# Altium PCB MAX77857.PcbDoc
Units mil, origin at the board's own origin, x right, y up, seen from the top; angles counter-clockwise.
Board outline 3537 x 1962 mil, 2 copper layers (Top Layer, Bottom Layer), stack 21 mil thick; 50 components, 58 nets, 221 pads, 51 vias.
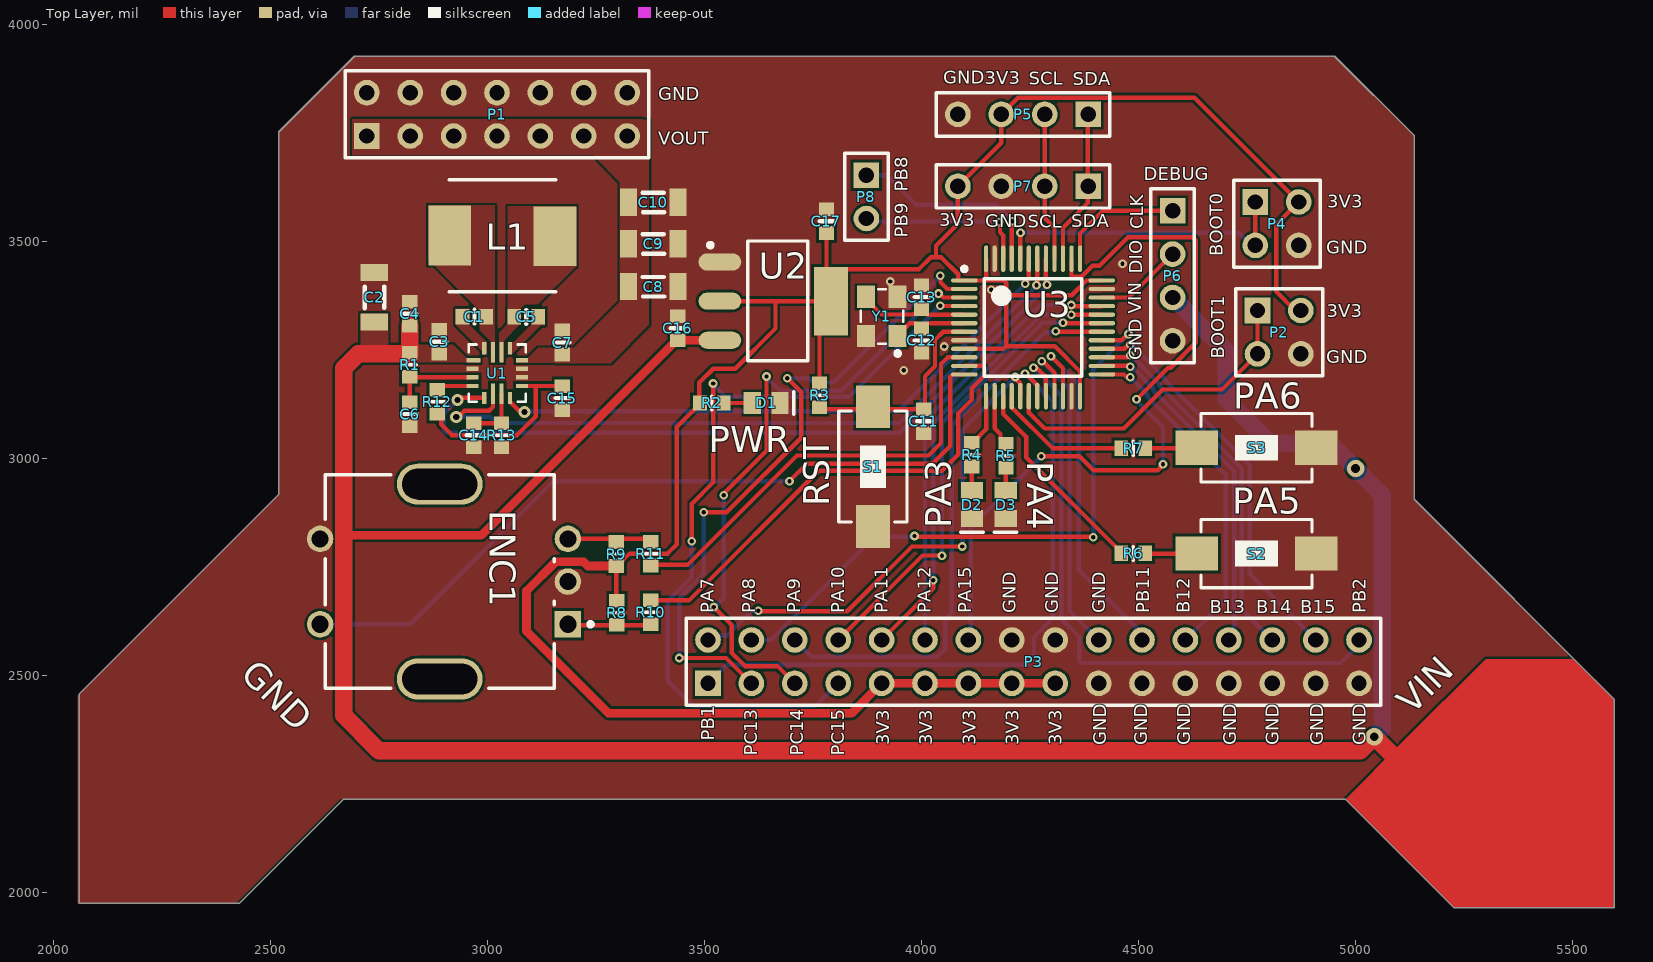
[diagram p0: Top Layer view]
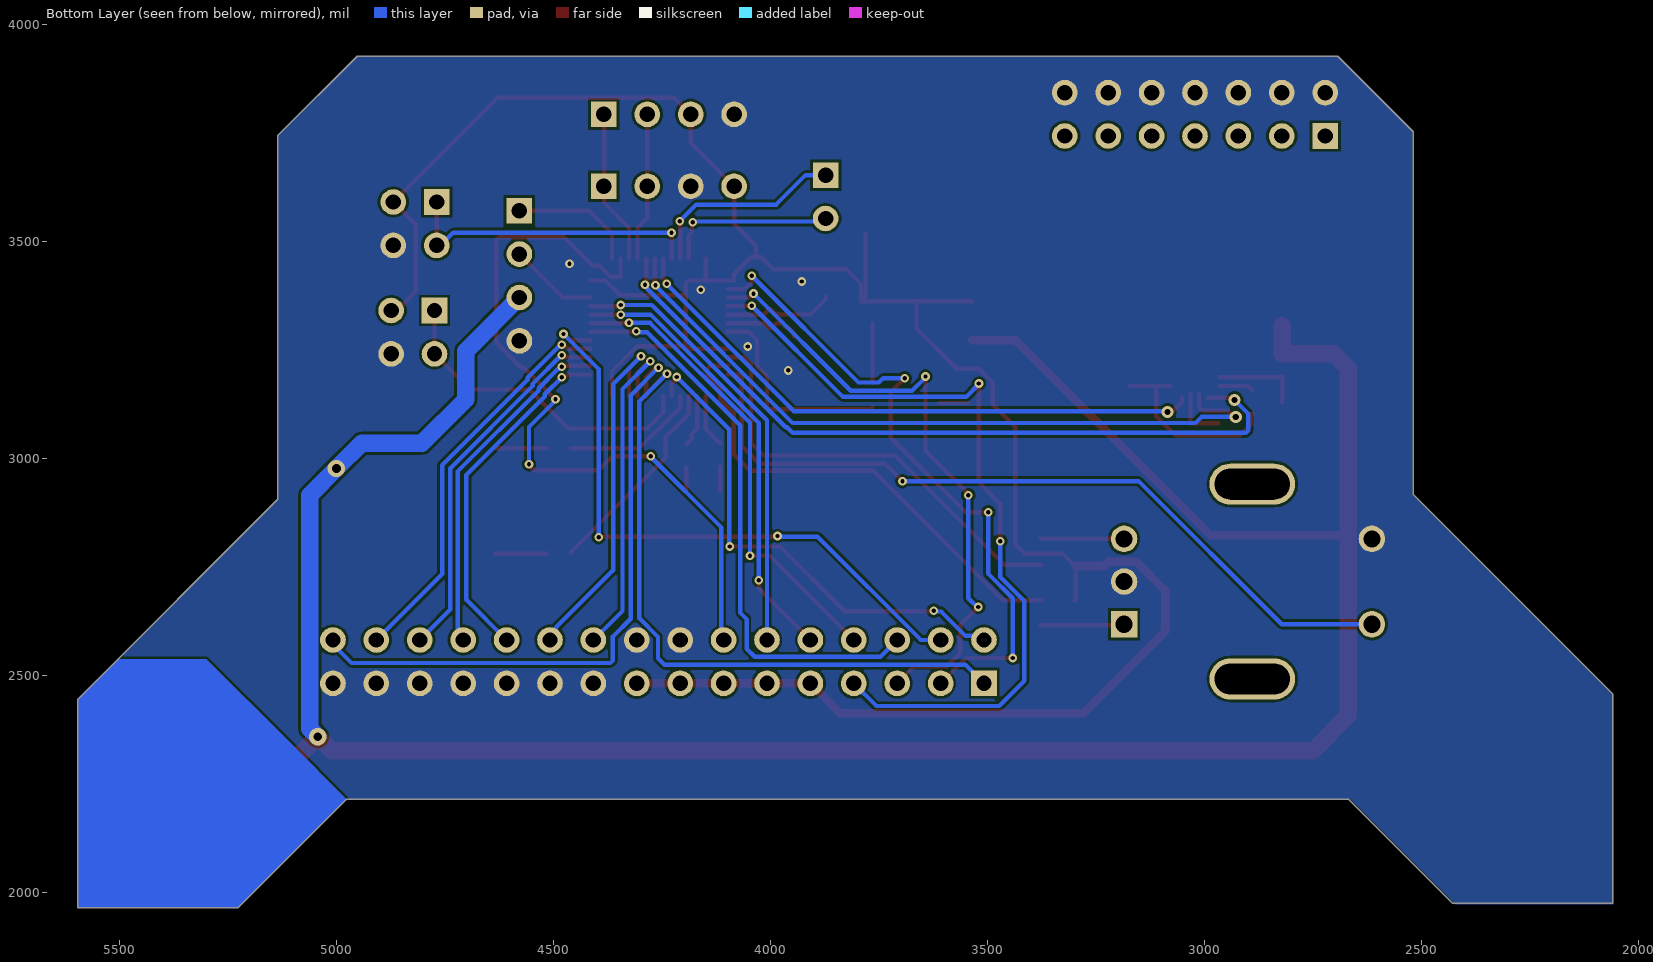
[diagram p1: Bottom Layer view, seen from below]
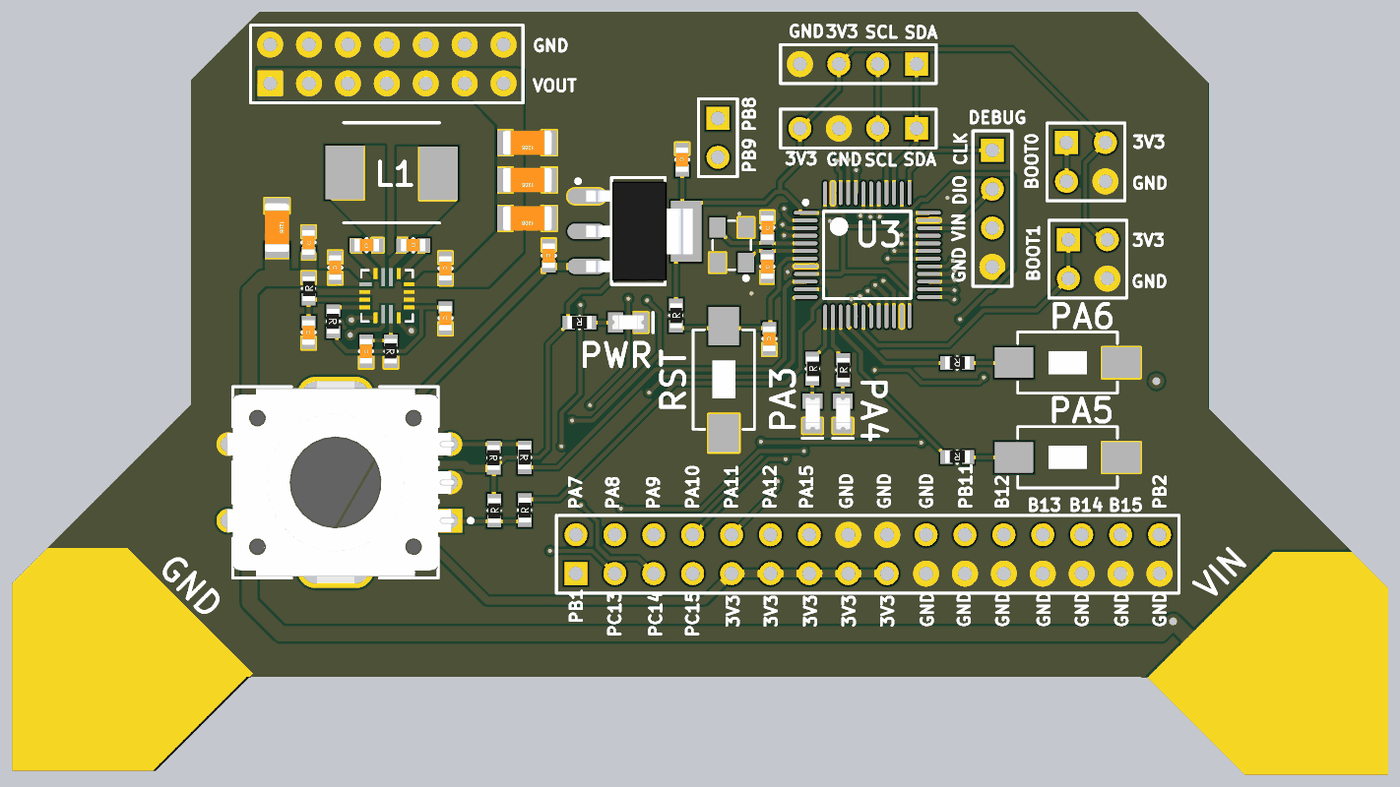
[diagram p2: 3D render of the assembled board from above, using the file's embedded part models]

## Layer stack, top to bottom
Top Solder: solder mask 0.4, Solder Resist, Dk 3.5
Top Layer: signal copper 1.4
Dielectric 2: prepreg 2.8, PP-006, Dk 4.1
Dielectric 1: dielectric 12.6, FR-4, Dk 4.8
Dielectric 3: prepreg 2.8, PP-006, Dk 4.1
Bottom Layer: signal copper 1.4
Bottom Solder: solder mask 0.4, Solder Resist, Dk 3.5

## Board outline
2059,1975 2060,1974 2428,1974 2668,2214 4977,2214 5227,1964 5596,1964 5596,2444 5135,2905 5135,3743 4952,3926 2693,3926 2519,3752 2519,2916 2059,2456

## Design rules (kind name [scope] priority, off if disabled: settings)
Clearance [All] p1: gap=6 ignorepadtopadclearanceinfootprint=TRUE
PolygonConnect [All] p1: connectstyle=Direct reliefconductorwidth=10 reliefentries=4 polygonreliefangle="90 Angle" airgapwidth=10
RoutingVias [All] p1: holewidth=28 width=50 viastyle="Through Hole" minholewidth=28 minwidth=50 maxholewidth=28 maxwidth=50
SolderMaskExpansion [All] p1: expansion=4 istentingtop=FALSE
Width [All] p1: maxlimit=100 minlimit=10 preferedwidth=10
30 further rules are at their usual default settings.

## Components (designator, comment, footprint, x,y, rotation, side; value= is the part's Value field where it differs from the comment)
C1 "Cap-S" C0603-L 2969.94,3325.77 r0 top value=100nF
C2 "Cap-S" C1206-L 2739.5,3370.23 r270 top value=100uF
C3 "Cap-S" C0603-L 2889.26,3267.98 r270 top value=22uF
C4 "Cap-S" C0603-L 2820.72,3332.77 r90 top value=0.1uF
C5 "Cap-S" C0603-L 3089.6,3325.77 r180 top value=100nF
C6 "Cap-S" C0603-L 2820.72,3101.41 r270 top value=22nF
C7 "Cap-S" C0603-L 3172.56,3266.26 r270 top value=0.1uF
C8 "Cap-S" C1206-L 3382.23,3395.17 r180 top value=10uF
C9 "Cap-S" C1206-L 3382.23,3493.64 r180 top value=10uF
C10 "Cap-S" C1206-L 3382.23,3589.5 r180 top value=100uF
C11 "Cap-S" C0603-L 4005,3085 r270 top value=100nF
C12 "Cap-S" C0603-L 4000,3271 r90 top value=12pF
C13 "Cap-S" C0603-L 4000,3371 r90 top value=12pF
C14 "Cap-S" C0603-L 2968.57,3052.87 r90 top value=1uF
C15 "Cap-S" C0603-L 3172.56,3138.31 r270 top value=1uF
C16 "Cap-S" C0603-L 3438,3299 r270 top value=1uF
C17 "Cap-S" C0603-L 3781,3546 r270 top value=2.2uF
D1 "LED" Led-0805_L 3642,3127 r0 top
D2 "LED" Led-0805_L 4116,2893 r270 top
D3 "LED" Led-0805_L 4194,2893 r270 top
ENC1 "PEC11R-4215F-S0024" FP-PEC11R-4215F-S0024-MFG 2890,2715.59 r90 top
L1 "10uH" L-6.5mm 3034.28,3512.06 r0 top
P1 "Header 7X2" HDR2X7 2722,3742 r0 top
P2 "Header 2X2" HDR2X2 4774,3340 r270 top
P3 "Header 16X2" HDR2X16 3508,2481 r0 top
P4 "Header 2X2" HDR2X2 4769,3590 r270 top
P5 "Header 4" HDR1X4 4383.82,3791.88 r180 top
P6 "Header 4" HDR1X4 4578.46,3570.06 r270 top
P7 "Header 4" HDR1X4 4383.82,3626.22 r180 top
P8 "Header 2" HDR1X2 3873,3652 r270 top
R1 "R" R0603-L 2820.72,3214.78 r90 top value=499K
R2 "R" R0603-L 3517,3127 r180 top value=470
R3 "R" R0603-L 3765,3145 r90 top value=10K
R4 "R" R0603-L 4116,3008 r90 top value=470
R5 "R" R0603-L 4194.49,3005.07 r90 top value=470
R6 "R" R0603-L 4488,2780.58 r180 top value=10K
R7 "R" R0603-L 4488,3023 r180 top value=10K
R8 "R" R0603-L 3298,2643.56 r90 top value=10K
R9 "R" R0603-L 3297,2779 r270 top value=10K
R10 "R" R0603-L 3376,2644.56 r90 top value=470
R11 "R" R0603-L 3376,2780 r270 top value=470
R12 "R" R0603-L 2884.26,3129.76 r270 top value=100K
R13 "R" R0603-L 3032.43,3052.87 r270 top value=100K
S1 "SW-PB2" SW-PB2-SMD 3888,2978 r0 top
S2 "SW-PB2" SW-PB2-SMD 4774,2780 r90 top
S3 "SW-PB2" SW-PB2-SMD 4774,3023.67 r90 top
U1 "MP8862GQ-xxxx-P" QFN-3x3_MP8862_MNP 3022.45,3195.81 r0 top
U2 "AMS1117" SOT-223 3660.52,3361.61 r270 top
U3 "STM32L051C8T6" STM-LQFP48_L 4257,3301 r0 top
Y1 "16Mhz" XTAL3225 3945,3281 r90 top

## Footprints (in the part's own frame and the unit in brackets; to place one, negate y for a bottom-side part, rotate by r counter-clockwise, add the part's x,y. Pads: shape width x height; smd on the part's side, far side on the other; paste and mask are expansions set on the pad)
C0603-L [mm] "贴片电容0603 高密度"
  rect 0.8x0.9 smd: 1(-0.7,0) 2(0.7,0)
  silkscreen extent 0,-0.39 0,0.41, body extent -0.8,-0.4 0.8,0.41, height 0.88
C1206-L [mm] "Capacitor 1206 (3216) for Startronics  高密度"
  rect 1x1.6 smd: 1(-1.45,0) 2(1.45,0)
  silkscreen extent -0.64,-0.56 0.64,0.58, body extent -1.63,-0.8 1.57,0.8, height 1
FP-PEC11R-4215F-S0024-MFG [mm]
  round 1.55 hole 1 paste-1000 mask+0: 1(-2.5,7) 2(2.5,7) B(2.5,-7.5) C(0,-7.5)
  rrect100% 2.4x5 hole 4.4 slot 1.8 at 0 deg paste-1000 mask+0: 3(-5.7,0) 4(5.7,0)
  rect 1.55x1.55 hole 1 paste-1000 mask+0: A(-2.5,-7.5)
  silkscreen extent -6.25,-8.95 6.25,6.7, body extent -7,-8.37 7,7.88, height 0.25
HDR1X2 [mm] "Connector; Header; 2 Position"
  rect 1.5x1.5 hole 0.9: 1(0,0)
  round 1.5 hole 0.9: 2(2.54,0)
  silkscreen extent -1.27,-1.27 3.81,1.27
HDR1X4 [mm] "Connector; Header; 4 Position"
  rect 1.5x1.5 hole 0.9: 1(0,0)
  round 1.5 hole 0.9: 2(2.54,0) 3(5.08,0) 4(7.62,0)
  silkscreen extent -1.27,-1.27 8.89,1.27
HDR2X2 [mm] "Connector; Header; 2x2 Position"
  rect 1.5x1.5 hole 0.9: 1(0,0)
  round 1.5 hole 0.9: 2(0,2.54) 3(2.54,0) 4(2.54,2.54)
  silkscreen extent -1.27,-1.27 3.81,3.81
HDR2X7 [mm] "Connector; Header; 7x2 Position"
  rect 1.5x1.5 hole 0.9: 1(0,0)
  round 1.5 hole 0.9: 2(0,2.54) 3(2.54,0) 4(2.54,2.54) 5(5.08,0) 6(5.08,2.54) 7(7.62,0) 8(7.62,2.54) 9(10.16,0) 10(10.16,2.54) 11(12.7,0) 12(12.7,2.54) 13(15.24,0) 14(15.24,2.54)
  silkscreen extent -1.27,-1.27 16.51,3.81
HDR2X16 [mm] "Connector; Header; 16x2 Position"
  rect 1.5x1.5 hole 0.9: 1(0,0)
  round 1.5 hole 0.9: 2(0,2.54) 3(2.54,0) 4(2.54,2.54) 5(5.08,0) 6(5.08,2.54) 7(7.62,0) 8(7.62,2.54) 9(10.16,0) 10(10.16,2.54) 11(12.7,0) 12(12.7,2.54) 13(15.24,0) 14(15.24,2.54) 15(17.78,0) 16(17.78,2.54) 17(20.32,0) 18(20.32,2.54) 19(22.86,0) 20(22.86,2.54) 21(25.4,0) 22(25.4,2.54) 23(27.94,0) 24(27.94,2.54) 25(30.48,0) 26(30.48,2.54) 27(33.02,0) 28(33.02,2.54) 29(35.56,0) 30(35.56,2.54) 31(38.1,0) 32(38.1,2.54)
  silkscreen extent -1.27,-1.27 39.37,3.81
L-6.5mm [mm]
  rect 2.5x3.5 smd: 1(-3.075,0.025) 2(3.075,-0.025)
  silkscreen extent -3.12,-3.28 3.12,3.28, body extent -3.13,-3 3.13,3, height 3
Led-0805_L [mm] "贴片LED0805-高密度"
  rect 1x1.3 smd: 1(-0.813,0) 2(0.813,0)
  silkscreen extent 1.63,-0.66 1.63,0.66, body extent -1.03,-0.44 1.03,0.47, height 0.85
QFN-3x3_MP8862_MNP [mil]
  rect 32x10 smd paste+0 mask+0: 1(-55.08,29.53)
  rect 28x10 smd paste-5 mask+0: 2(-57.09,9.84) 3(-57.09,-9.85) 4(-57.09,-29.53) 9(57.09,-29.53) 10(57.09,-9.85) 11(57.09,9.84) 12(57.09,29.53)
  rect 10x28 smd paste-5 mask+0: 5(-29.53,-57.09) 8(29.54,-57.09) 13(29.54,57.09) 16(-29.53,57.09)
  rect 10x47 smd paste+0 mask+0: 6(-9.84,-47.6) 7(9.85,-47.6) 14(9.85,47.6) 15(-9.84,47.6)
  silkscreen extent -66,-66 66,66
R0603-L [mm] "贴片电阻0603 高密度"
  rect 0.8x0.9 smd: 1(-0.7,0) 2(0.7,0)
  silkscreen extent 0,-0.39 0,0.41, body extent -0.81,-0.43 0.79,0.39, height 0.53
SOT-223 [mm]
  oval 1x2.5 smd: 1(-2.29,-3.175) 2(0,-3.175) 3(2.29,-3.175)
  rect 4x2 smd: 2(0,3.325)
  silkscreen extent -3.52,-3.86 3.48,1.96, body extent -3.25,-3.2 3.25,3.76, height 1.66
STM-LQFP48_L [mm] "QFP, 48-Leads, Body 7x7mm, Pitch 0.5mm, IPC High Density"
  oval 1.55x0.25 smd: 1(-4.025,2.75) 2(-4.025,2.25) 3(-4.025,1.75) 4(-4.025,1.25) 5(-4.025,0.75) 6(-4.025,0.25) 7(-4.025,-0.25) 8(-4.025,-0.75) 9(-4.025,-1.25) 10(-4.025,-1.75) 11(-4.025,-2.25) 12(-4.025,-2.75) 25(4.025,-2.75) 26(4.025,-2.25) 27(4.025,-1.75) 28(4.025,-1.25) 29(4.025,-0.75) 30(4.025,-0.25) 31(4.025,0.25) 32(4.025,0.75) 33(4.025,1.25) 34(4.025,1.75) 35(4.025,2.25) 36(4.025,2.75)
  oval 0.25x1.55 smd: 13(-2.75,-4.025) 14(-2.25,-4.025) 15(-1.75,-4.025) 16(-1.25,-4.025) 17(-0.75,-4.025) 18(-0.25,-4.025) 19(0.25,-4.025) 20(0.75,-4.025) 21(1.25,-4.025) 22(1.75,-4.025) 23(2.25,-4.025) 24(2.75,-4.025) 37(2.75,4.025) 38(2.25,4.025) 39(1.75,4.025) 40(1.25,4.025) 41(0.75,4.025) 42(0.25,4.025) 43(-0.25,4.025) 44(-0.75,4.025) 45(-1.25,4.025) 46(-1.75,4.025) 47(-2.25,4.025) 48(-2.75,4.025)
  silkscreen extent -4.15,-2.85 2.85,3.55, body extent -3.5,-3.5 3.5,3.5, height 1.6
SW-PB2-SMD [mm] "贴片2脚微动开关"
  rect 2x2.5 smd: 1(0,3.556) 2(0,-3.444)
  silkscreen extent -2,-3.19 2,3.31, body extent -1.93,-3.94 1.92,3.95, height 2.5
XTAL3225 [mm]
  rect 1.3x1.05 smd: 1(0,0) 2(2.3,0) 3(2.3,1.85) 4(0,1.85)
  silkscreen extent -1.14,-0.33 2.74,2.17

## Part data
C1 C2 C3 C4 C5 C6 C7 C8 C9 C10 C11 C12 C13 C14 C15 C16 C17: "贴片瓷片电容"
D1 D2 D3: "发光二极管"
ENC1: library part CMP-1747-00012-2, "ROTARY ENCODER MECHANICAL 24PPR", Max Operating Temperature=70°C, Min Operating Temperature=-30°C, Package Quantity=150, Built in Switch=Yes, Detent=Yes, Encoder Type=Mechanical, Height=13.4mm, Hole Diameter=1.8mm, Length=21.5mm, Mount="Through Hole", Number of Channels=2, Orientation=Vertical, Output Type=Quadrature, Packaging=Bulk, Pulses per Revolution=24, Radiation Hardening=No, REACH SVHC="No SVHC", RoHS Compliant=Yes, Series=PEC11R, Termination="PC Pins", Type=Mechanical, Width=12.5mm
L1: library part Inductor
P1: "Header, 7-Pin, Dual row", LatestRevisionDate=17-Jul-2002, LatestRevisionNote="Re-released for DXP Platform.", Publisher="Altium Limited"
P2 P4: "Header, 2-Pin, Dual row", LatestRevisionDate=17-Jul-2002, LatestRevisionNote="Re-released for DXP Platform.", Publisher="Altium Limited"
P3: "Header, 16-Pin, Dual row", LatestRevisionDate=17-Jul-2002, LatestRevisionNote="Re-released for DXP Platform.", Publisher="Altium Limited"
P5 P6 P7: "Header, 4-Pin", LatestRevisionDate=17-Jul-2002, LatestRevisionNote="Re-released for DXP Platform.", Publisher="Altium Limited"
P8: "Header, 2-Pin", LatestRevisionDate=17-Jul-2002, LatestRevisionNote="Re-released for DXP Platform.", Publisher="Altium Limited"
R1 R2 R3 R4 R5 R6 R7 R8 R9 R10 R11 R12 R13: library part Res, "贴片电阻"
S1 S2 S3: "贴片式2脚微动开关"
U1: "No Description Available", Mfr_Name="Monolithic Power Systems", RefDes=RefDes, Type=Type
U3: library part CMP-1546-00003-1, "Ultra-Low-Power ARM Cortex-M0+ MCU, 64 KB Flash, 1.8 to 3.6 V, -40 to 85 degC, 48-Pin LQFP, RoHS, Tray", Temperature Max="85 degC", Temperature Min="-40 degC", ComponentLink1Description="Manufacturer URL", ComponentLink1URL=http://www.st.com/web/en/home.html, ComponentLink2Description=Datasheet, ComponentLink2URL=http://www.st.com/st-web-ui/static/active/en/resource/technical/document/datasheet/DM00108219.pdf, ComponentLink3Description="Package Specification", ComponentLink3URL=http://www.st.com/st-web-ui/static/active/en/resource/technical/document/datasheet/DM00058181.pdf, Data EEPROM="2 KB", DatasheetVersion="Rev. 4", Flash="64 KB", Mounting Technology="Surface Mount", PackageDescription="48-Pin Frame Chip Scale Package, Body 7 x 7 mm, Pitch 0.5 mm", Packing=Tray, PartNumber=STM32L051C8T6, RAM="8 KB", RoHS=TRUE, VDD Max="3.6 V", VDD Min="1.8 V"
Y1: library part XTAL_3225, "3225贴片无源晶振"

## Via types
v1: diameter 20, hole 10, Top Layer to Bottom Layer, tented both sides, 46 vias
v2: diameter 28, hole 14, Top Layer to Bottom Layer, tented both sides, 3 vias
v3: diameter 40, hole 20, Top Layer to Bottom Layer, tented both sides, 2 vias

## Nets (pads, with @x,y where several pads share a name; then routed paths per layer and width w, separated by ;. In a path a pad name is that pad's centre, name@x,y a point inside that pad or via, vN(x,y) a via of type N, cw(c..) or ccw(c..) an arc to the next point about the centre after c; other vN are vias at no path point)
3V3: C17.2 P3.9 P3.11 P3.13 P3.15 P3.17 P4.2 P5.3 P7.4 R2.2 R3.2 R8.2 R9.2 U2.2 U3.1 U3.9 U3.24 U3.36 U3.48 | length 5917.3
  Top Layer w10: R8.2@3300,2671.12 3297,2674.12 R9.2 3298.97,2751.44 3327.53,2780 3415,2780 3436,2801 3436,3071.59 3488,3123.59 3488,3174 3520,3206 3571,3206 3663.47,3298.47 3663.47,3361.61 ; U2.2@3535.52,3361.61 3663.47,3361.61 ; R3.2 3765,3227 U2.2@3765,3311 ; C17.2 3781,3372.03 U2.2@3791.42,3361.61 ; U3.9 4188.79,3251.79 4195,3258 ; U3.48 4148.73,3414.16 4143.84,3409.27 ; U3.24 4365.27,3199.73 4307,3258 4195,3258 ; U3.36 4415.39,3409.19 4380.07,3409.19 4345.88,3375 4195,3375 ; 4874,3340 4860.73,3340 4817,3383.73 4817,3538 P4.2 4628.59,3830.41 4222.34,3830.41 P5.3 4183.82,3726.22 P7.4 4083.82,3539.82 4033.4,3489.4 4033.4,3462.63 ; 3663.47,3361.61 U2.2@3791.42,3361.61 ; U2.2@3791.42,3361.61 3791.42,3400.98 3825.79,3435.35 3994.35,3435.35 4021.63,3462.63 4033.4,3462.63 ; 4033.4,3462.63 4045.18,3462.63 4084.39,3423.41 4084.39,3409.35 4084.47,3409.27 U3.1 4143.84,3409.27 ; 4143.84,3409.27 4189.14,3409.27 4195,3403.41 4195,3375 ; 4195,3258 4195,3375
  Top Layer w20: R9.2 3230.8,2751.44 3221.24,2761 3157,2761 3090,2694 3090,2601 3279,2412 3839,2412 P3.9 P3.11 P3.13 P3.15 P3.17
EC11_A: R10.2 U3.11 | length 1119.8
  Top Layer w10: R10.2 3464.12,2672.12 3763,2971 4047,2971 4085,3009 4085,3104 4116,3135 4116,3161 4145,3190 4145,3206.56 4139.14,3212.42 U3.11
EC11_B: R11.2 U3.10 | length 1027.8
  Top Layer w10: R11.2 3377.56,2754 3461,2754 3713,3006 4016,3006 4045,3035 4045,3217 4060.02,3232.02 4098.46,3232.02 U3.10
EC11_SWITCH: ENC1.1 U3.12 | length 1815.6
  Top Layer w10: v1(3696,2947) 3736,2987 4025,2987 4066,3028 4066,3186.87 4071.86,3192.73 U3.12
  Bottom Layer w10: ENC1.1 2822.17,2617.17 3152,2947 v1(3696,2947)
GND: C2.1 C3.1 C4.2 C6.2 C7.1 C8.1 C9.1 C10.1 C11.2 C12.1 C13.2 C14.1 C15.2 C16.1 C17.1 D1.2 D2.2 D3.2 ENC1.2 ENC1.C P1.2 P1.4 P1.6 P1.8 P1.10 P1.12 P1.14 P2.4 P3.16 P3.18 P3.19 P3.21 P3.23 P3.25 P3.27 P3.29 P3.31 P4.4 P5.4 P6.4 P7.3 R13.2 S1.2 S2.2 S3.2 U1.2 U1.10 U1.11 U2.1 U3.8 U3.23 U3.35 U3.47 Y1.2 Y1.4
  other v1: 3959,3202 4052,3257 4161,3388 3928,3407 4463,3448
KEY1: R6.2 U3.15 | length 474.8
  Top Layer w10: U3.15 4188.1,3101.9 4241,3049 4241,3001.99 4460.44,2782.55 R6.2
KEY2: R7.2 U3.16 | length 317.2
  Top Layer w10: U3.16 4207.87,3142.46 4207.87,3116.86 4301.73,3023 R7.2
LED1: R4.2 U3.13 | length 121.7
  Top Layer w10: R4.2 4117.97,3035.56 4148.73,3066.32 U3.13
LED2: R5.2 U3.14 | length 121.7
  Top Layer w10: U3.14 4168.42,3068.58 4182.09,3054.91 4182.09,3043.37 4192.84,3032.63 R5.2
NetC1_1: C1.1 U1.16
NetC1_2: C1.2 L1.1 U1.15
NetC5_1: C5.1 U1.13
NetC5_2: C5.2 L1.2 U1.14
NetC6_1: C6.1 R1.1 U1.3 | length 203.4
  Top Layer w10: C6.1 R1.1 2821.97,3185.96 U1.3
NetC7_2: C7.2 C8.2 C9.2 C10.2 P1.1 P1.3 P1.5 P1.7 P1.9 P1.11 P1.13 U1.12
NetC12_2: C12.2 U3.6 Y1.1 | length 172.1
  Top Layer w10: Y1.1 3945,3285.92 3960.67,3301.59 3963.7,3301.59 3973.11,3311 3985.59,3311 3998.03,3298.56 4001.97,3298.56 C12.2@4014.25,3310.84 ; 4021.25,3310.84 U3.6
NetC13_1: C13.1 U3.5 Y1.3 | length 249.6
  Top Layer w10: Y1.3 3872.17,3366.63 3907.8,3331 3981.43,3331 3983.12,3332.69 3989.25,3332.69 C13.1 4001.97,3343.44 C13.1@4014.88,3330.53 ; 4021.88,3330.53 U3.5
NetC14_2: C14.2 R13.1 U1.7 | length 131.7
  Top Layer w10: C14.2 R13.1 3032.3,3080.56 U1.7
NetD1_1: D1.1 R2.1 | length 65.4
  Top Layer w10: R2.1 D1.1
NetD2_1: D2.1 R4.1 | length 55.4
  Top Layer w10: D2.1 R4.1
NetD3_1: D3.1 R5.1 | length 52.7
  Top Layer w10: D3.1 4194,2977.01 R5.1
NetENC1_A: ENC1.A R8.1 R10.1 | length 193.6
  Top Layer w10: ENC1.A 3187.44,2615 3298,2615 R10.1@3378,2615
NetENC1_B: ENC1.B R9.1 R11.1 | length 194.1
  Top Layer w10: ENC1.B 3298,2814.02 3374.57,2814.02 R11.1@3378,2817.44
NetP2_1: P2.1 P2.3 U3.18 | length 751
  Top Layer w10: U3.18 4247.16,3104.84 4284,3068 4466,3068 4556,3158 4692,3158 P2.3 P2.1
NetP4_1: P4.1 P4.3 U3.44 | length 712.8
  Top Layer w10: U3.44 4227.55,3459.54 4227.55,3518.55 v1(4228,3519) ; P4.3 P4.1
  Bottom Layer w10: v1(4228,3519) 4731.2,3519 4760.2,3490 P4.3
NetR6_1: R6.1 S2.1 | length 118.7
  Top Layer w10: R6.1 4516.14,2780 S2.1
NetR7_1: R7.1 S3.1 | length 118.7
  Top Layer w10: R7.1 4633.33,3023 S3.1
NetR12_1: R12.1 U1.4 | length 78.8
  Top Layer w10: R12.1@2890.26,3157.32 2899.22,3166.27 U1.4
NRST: C11.1 R3.1 S1.1 U3.7 | length 487.7
  Top Layer w10: R3.1 3769.88,3112.56 C11.1 4008,3115.56 4008,3188.8 4031,3211.8 4031,3272 4050.16,3291.16 U3.7
OLED_SCL: P5.2 P7.2 U3.40 | length 341.7
  Top Layer w10: P5.2 P7.2 4283.82,3553.18 4306.21,3530.79 U3.40
OLED_SDA: P5.1 P7.1 U3.39 | length 348.4
  Top Layer w10: U3.39 4325.9,3530.79 4382.66,3587.55 4382.66,3625.88 4383,3626.22 P5.1@4383,3784.26
PA7: P3.2 U3.17 | length 1166.8
  Top Layer w10: v1@3624,2647 3829,2647 3978.2,2796.2 v1(4094.05,2796.2) ; v1(4215.75,3186.92) 4215.75,3184.21 4227.39,3172.56 4227.39,3142.61 U3.17
  Bottom Layer w10: P3.2 3517.39,2590.39 3550.66,2590.39 3606.9,2646.62 3621.94,2646.62 v1(3623.85,2648.53) ; v1@4095,2795 4095,3066.17 v1(4215.75,3186.92)
PA8: P3.4 U3.29 | length 1456
  Top Layer w10: v1(3983.7,2820.36) 3984.88,2819.18 4394.82,2819.18 v1(4396,2818) ; U3.29 4460.98,3271.47 4475.5,3286 v1(4477,3286)
  Bottom Layer w10: P3.4 3653.51,2581 3891.51,2819 v1@3983,2819 ; v1(4396,2818) 4396,3205 v1(4477,3286)
PA9: P3.6 U3.30 | length 1327.1
  Top Layer w10: v1(4309,3292) 4309.76,3291.24 4415.39,3291.24 U3.30
  Bottom Layer w10: P3.6 3746.53,2542.47 4036.47,2542.47 4055,2561 4055,2629 4070,2644 4070,3075.87 4284.22,3290.09 4307.09,3290.09 v1(4309,3292)
PA10: P3.8 U3.31 | length 1090.2
  Top Layer w10: P3.8 4002.53,2775.53 4046.47,2775.53 v1(4047,2775) ; v1(4326,3311.53) 4326.61,3310.92 4415.39,3310.92 U3.31
  Bottom Layer w10: v1(4047,2775) 4047,3081.2 4277.33,3311.53 v1(4326,3311.53)
PA11: P3.10 U3.32 | length 1040.6
  Top Layer w10: P3.10 4026.85,2699.85 v1(4026.85,2718.53) ; v1@4347,3331 4347.47,3330.53 U3.32
  Bottom Layer w10: v1@4027,2717 4027,3081 4276.53,3330.53 v1(4344.85,3330.53)
PA12: P3.12 U3.33 | length 1023.4
  Top Layer w10: v1@4345,3350 4345.21,3350.21 U3.33
  Bottom Layer w10: P3.12 4008,3087 4273.53,3352.53 v1(4344.85,3352.53)
PA15: P3.14 U3.38 | length 1758.6
  Top Layer w10: v1(4275.85,3004.53) 4363.51,3004.53 4396.05,2972 4544,2972 v1@4556,2984 ; U3.38 4345.58,3417.58 4368.66,3417.58 4394.08,3443 4410,3443 4475.59,3508.59 4625.55,3508.59 4632,3502.14 4632,3266 4574,3208 4568.03,3208 v1(4495.32,3135.29)
  Bottom Layer w10: P3.14 4113.05,2586.05 4113.05,2840.05 v1@4276,3003 ; v1@4495,3133 4556.31,3071.69 v1(4556.31,2985.57)
PB1: P3.1 U3.19 | length 1513.9
  Top Layer w10: v1(4238.52,3194.5) 4240.47,3194.5 4261.08,3173.89 4261.08,3173.73 U3.19@4266.76,3168.05
  Bottom Layer w10: P3.1 3551,2524 4244,2524 4259,2539 4259,2588 4302,2631 4302,3131.02 v1(4238.52,3194.5)
PB2: P3.32 U3.20 | length 1475.2
  Top Layer w10: v1(4258.02,3208.48) 4259.93,3206.57 4266.71,3206.57 4286.53,3186.75 U3.20
  Bottom Layer w10: v1(4258.02,3208.48) 4322,3144.51 4322,2630 4363,2589 4363,2533.86 4368.86,2528 4965.14,2528 5008,2570.86 P3.32
PB8: P8.1 U3.45 | length 466.9
  Top Layer w10: U3.45 4207.87,3459.54 4207.87,3544.87 v1(4209,3546)
  Bottom Layer w10: P8.1 3919,3652 3987,3584 4171,3584 v1(4209,3546)
PB9: P8.2 U3.46 | length 397
  Top Layer w10: v1(4179,3543) 4180.91,3541.09 4180.91,3520.19 4188.1,3513 U3.46
  Bottom Layer w10: P8.2 3880.09,3544.91 4177.09,3544.91 v1(4179,3543)
PB10: P3.20 U3.21 | length 790.6
  Top Layer w10: v1(4277.08,3223.08) 4279.78,3223.08 4295.84,3207.02 4295.98,3207.02 4306.21,3196.79 U3.21
  Bottom Layer w10: v1(4277.08,3223.08) 4341,3159.15 4341,2648 P3.20
PB11: P3.22 U3.22 | length 843.7
  Top Layer w10: v1(4298.23,3234.42) 4325.9,3206.75 U3.22
  Bottom Layer w10: v1(4298.23,3234.42) 4362.13,3170.51 4362.13,2742 4494.08,2610.05 4494.08,2608.19 4508,2594.27 P3.22
PB12: P3.24 U3.25 | length 798
  Top Layer w10: U3.25 4466.56,3192.73 4473.29,3186 v1@4476,3186
  Bottom Layer w10: v1(4481,3186) 4520.06,3146.93 4520.06,3141.93 4701,2961 4701,2674 P3.24
PB13: P3.26 U3.26 | length 802.5
  Top Layer w10: U3.26 4476.01,3212.42 4478.26,3210.16 v1(4480.97,3210.16)
  Bottom Layer w10: v1(4480.97,3210.16) 4483.67,3210.16 4488.84,3205 4490,3205 4534.06,3160.93 4534.06,3155.93 4720.8,2969.2 4720.8,2607.07 4708,2594.27 P3.26
PB14: P3.28 U3.27 | length 859.6
  Top Layer w10: U3.27 4473.4,3232.1 4478.29,3237 v1(4481,3237)
  Bottom Layer w10: v1(4481,3237) 4482,3237 4548.06,3170.93 4548.06,3165.93 4737.77,2976.23 4737.77,2651.23 P3.28
PB15: P3.30 U3.28 | length 922.8
  Top Layer w10: U3.28 4466.81,3251.79 v1@4475.91,3260.88
  Bottom Layer w10: v1(4481,3260.88) 4483.71,3260.88 4488.59,3256 4488.87,3256 4559,3185.87 4559,3180.87 4756.06,2983.81 4756.06,2732.86 4761.92,2727 4762,2727 P3.30
PC13: P3.3 U3.2 | length 1531.5
  Top Layer w10: v1(3441.85,2539.53) 3549.47,2539.53 P3.3 ; v1@3498,2875 3551,2875 3723,3047 3723,3152 v1(3691,3184) ; v1(4043.22,3419.88) 4043.85,3419.26 4043.85,3405.15 4059.42,3389.58 U3.2
  Bottom Layer w10: v1@3442,2538 3442,2677.19 3498.02,2733.21 v1(3498.02,2875.1) ; v1(3691,3184) 3740.52,3184 3750.52,3174 3797.34,3174 v1(4043.22,3419.88)
PC14: P3.5 U3.3 | length 1446.8
  Top Layer w10: v1(3521.38,2656.88) 3563,2615.26 3563,2551 3593.31,2520.69 3668.31,2520.69 P3.5 ; v1@3544,2913 3544,2918 3642.74,3016.74 v1(3642.74,3188.13) ; v1(4039,3379) 4041.71,3379 4050.81,3369.9 U3.3
  Bottom Layer w10: v1@3522,2655 3544.13,2677.13 v1(3544.13,2914.51) ; v1@3643,3186 3674,3155 3815,3155 v1(4039,3379)
PC15: P3.7 U3.4 | length 1846.2
  Top Layer w10: v1@3471,2807 3471,2895 3519.79,2943.79 v1(3519.79,3171.96) ; v1(4043.1,3350.9) 4043.71,3350.29 4098.46,3350.29 U3.4
  Bottom Layer w10: v1(3470.85,2808.53) 3470.85,2725.84 3415,2669.99 3415,2487 3473,2429 3756,2429 P3.7 ; v1@3520,3170 3549,3141 3833.2,3141 v1(4043.1,3350.9)
PWR_ALT: U1.8 U3.43 | length 1389.9
  Top Layer w10: U1.8 3051.99,3129.72 3072.26,3109.44 3081.56,3109.44 v2(3085,3106) ; v1(4239,3402) 4239,3404.71 4247.16,3412.86 U3.43
  Bottom Layer w10: v2(3085,3106) 3087,3108 3946,3108 4239,3401 v1(4239,3402)
PWR_SCL: U1.5 U3.41 | length 1744.7
  Top Layer w10: v2(2930.72,3133.63) 2935.59,3133.63 2940.68,3138.72 U1.5 ; U3.41 4286.53,3404.18 4289,3401.71 v1(4289,3399)
  Bottom Layer w10: v2(2930.72,3133.63) 2899,3101.91 2899,3063.86 2904.86,3058 3948.63,3058 3961.63,3071 3965,3071 4284.01,3390.01 4284.01,3391.3 4289,3396.29 v1(4289,3399)
PWR_SDA: U1.6 U3.42 | length 1661.5
  Top Layer w10: v2(2927.98,3095) 2932.85,3095 2946.85,3109 3004,3109 3012.61,3117.61 U1.6 ; v1(4265.01,3398.42) 4266.76,3400.18 4266.76,3459.39 U3.42
  Bottom Layer w10: v2(2927.98,3095) 3007.1,3095 3021.1,3081 3949,3081 4265.01,3397.01 v1(4265.01,3398.42)
SWCLK: P6.1 U3.37 | length 292.9
  Top Layer w10: U3.37 4365.27,3517.27 4418.06,3570.06 P6.1
SWDIO: P6.2 U3.34 | length 204.5
  Top Layer w10: U3.34 4478.3,3369.9 P6.2
VCC: C15.1 R12.2 U1.9 | length 435.4
  Top Layer w10: R12.2@2890.26,3102.2 2893.69,3098.77 2893.69,3077.31 2918,3053 3068,3053 3111,3096 3111,3165.27 3112,3166.27 ; U1.9 3112,3166.27 ; C15.1 3172.15,3166.27 3112,3166.27
VIN: C2.2 C3.2 C4.1 C16.2 P6.3 R1.2 U1.1 U2.3 | length 5942.2
  Top Layer w10: U2.3@3505.99,3271.46 U2.3 ; 5101,2300 5128,2300
  Top Layer w20: 2668.92,2822 2986,2822 3429.69,3265.69 3430.28,3265.69 3435.46,3270.87 3435.46,3271.46 3505.99,3271.46 U2.3
  Top Layer w40: R1.2@2820.72,3240.42 2702.42,3240.42 2668.92,3206.92 2668.92,2822 2668.92,2407.08 2750,2326 5011,2326 v3(5043,2358) 5101,2300 ; R1.2 C4.1
  Bottom Layer w40: P6.3 4702,3246.53 4702,3135 4803,3034 4942,3034 v3(5000,2976) 5061.53,2914.47 5061.53,2376.53 v3(5043,2358)
pads on no net: ENC1.3 ENC1.4 P2.2

## Polygon pours and split planes (outlines as drawn)
GND on Top Layer "NONET_L-01_P-001" (solid, pour order 15): 2692,3926 2519,3753 2519,2916 2056,2453 2056,1973 2419,1973 2661,2215 4976,2215 5227,1964 5596,1964 5596,2445 5593,2445 5133,2905 5133,3745 4951,3927 4950,3926
NetC7_2 on Top Layer "NONET_L-01_P-001" (solid, pour order 11): 3066,3220 3190,3220 3190,3254 3117,3254 3093,3230 3066,3230 3066,3221
NetC7_2 on Top Layer "NONET_L-01_P-001" (solid, pour order 12): 3153.5,3254 3199,3254 3305,3360 3305,3635 3244,3698 3228,3698 2689,3698 2689,3782 2690,3781 3357,3781 3357,3320 3256,3219 3153,3219
NetC7_2 on Top Layer "NONET_L-01_P-001" (solid, pour order 14): 3153.5,3254 3154.5,3253 3229,3253 3305,3329 3305,3637 3244,3698 2689,3698 2689,3780 2690,3781 2692,3779 3372,3779 3372,3307 3284,3219 3153,3219
NetC5_1 on Top Layer "NONET_L-01_P-001" (solid, pour order 7): 3101,3343 3101,3307 3061,3267 3047.35,3267 3047,3266.65 3047,3239 3056,3239 3123,3306 3132,3306 3132,3343
NetC5_2 on Top Layer "NONET_L-01_P-001" (solid, pour order 5): 3027,3220 3027,3289 3047,3309 3047,3580 3204,3580 3204,3442 3116,3354 3086,3354 3076,3344 3076,3309 3037,3270 3037,3221
NetC1_1 on Top Layer "NONET_L-01_P-001" (solid, pour order 3): 2998,3239 2997.89,3239.11 2997.89,3267.11 2958,3307 2958,3344 2926,3344 2926,3308 2988,3246 2988,3239
NetC1_2 on Top Layer "NONET_L-01_P-001" (solid, pour order 2): 3017,3220 3017,3344 3017,3582 2864,3582 2864,3458 2982,3340 2982,3295 3008,3269 3008,3220
VIN on Top Layer "NONET_L-01_P-001" (solid, pour order 1): 2708,3333 2708.01,3332.99 2708.01,3241.3 2769.7,3241.3 2771,3240 2771,3333
VIN on Top Layer "NONET_L-01_P-001" (solid, pour order 0): 2983,3221 2910,3221 2803,3221 2803,3260 2804,3261 2921,3261 2952,3230 2983,3230
GND on Bottom Layer "NONET_L-01_P-001" (solid, pour order 16): 2694.45,3925 2521.45,3752 2521.45,2915 2058.45,2452 2058.45,1972 2421.45,1972 2663.45,2214 4978.45,2214 5229.45,1963 5598.45,1963 5598.45,2444 5595.45,2444 5135.45,2904 5135.45,3744 4953.45,3926 4952.45,3925

## Other copper
Top Layer:
  region net VIN: 4977,2214 5227,1964 5596,1964 5596,2445 5504,2537 5300,2537 5109,2346
Bottom Layer:
  region net VIN: 4977,2214 5227,1964 5596,1964 5596,2445 5504,2537 5300,2537 5109,2346

## Silkscreen, mask and mechanical layers (free items; w line width, h text height)
Top Overlay:
  text "GND" at 4050,3862 h30
  text "3V3" at 4146,3861 h30
  text "SCL" at 4247,3860 h30
  text "SDA" at 4348,3859 h30
  text "GND" at 3393,3825 h30
  text "VOUT" at 3393,3722 h30
  text "DEBUG" at 4512,3640 h30
  text "PB8" at 3968,3614 h30 r90
  text "3V3" at 4935,3577 h30
  text "3V3" at 4041,3534 h30
  text "GND" at 4147,3532 h30
  text "SDA" at 4345,3532 h30
  text "SCL" at 4245,3531 h30
  text "CLK" at 4511,3527 h30 r90
  text "PB9" at 3968,3508 h30 r90
  text "GND" at 4933,3471 h30
  text "BOOT0" at 4694,3465 h30 r90
  text "DIO" at 4509,3425 h30 r90
  text "VIN" at 4506,3332 h30 r90
  text "3V3" at 4934,3324 h30
  text "BOOT1" at 4698,3229 h30 r90
  text "GND" at 4507,3225 h30 r90
  text "GND" at 4932,3218 h30
  text "PA6" at 4718,3114 h60
  text "PWR" at 3510,3014 h60
  text "PA4" at 4244,2993 h60 r270
  text "RST" at 3787,2889 h60 r90
  text "PA5" at 4716,2872 h60
  text "PA3" at 4069,2838 h60 r90
  text "PA7" at 3521,2643 h30 r90
  text "PA8" at 3616.85,2643 h30 r90
  text "PA9" at 3721,2643 h30 r90
  text "PA10" at 3822,2643 h30 r90
  text "PA11" at 3922,2643 h30 r90
  text "PA12" at 4021,2643 h30 r90
  text "PA15" at 4115,2643 h30 r90
  text "GND" at 4217.29,2643 h30 r90
  text "GND" at 4315.29,2643 h30 r90
  text "GND" at 4423.29,2643 h30 r90
  text "PB11" at 4524.29,2643 h30 r90
  text "B12" at 4618,2643 h30 r90
  text "B13" at 4664,2643 h30
  text "B14" at 4771,2643 h30
  text "B15" at 4873,2643 h30
  text "PB2" at 5023,2643 h30 r90
  text "GND" at 2428.14,2498 h60 r315
  text "VIN" at 5131,2406.14 h60 r45
  text "PB1" at 3523,2348.94 h30 r90
  text "3V3" at 3926,2338.94 h30 r90
  text "3V3" at 4024.29,2338.94 h30 r90
  text "3V3" at 4125.29,2338.94 h30 r90
  text "3V3" at 4224.29,2338.94 h30 r90
  text "3V3" at 4323.29,2338.94 h30 r90
  text "GND" at 4425.29,2338.94 h30 r90
  text "GND" at 4520.29,2338.94 h30 r90
  text "GND" at 4619.29,2338.94 h30 r90
  text "GND" at 4725.29,2338.94 h30 r90
  text "GND" at 4823.29,2338.94 h30 r90
  text "GND" at 4925.29,2338.94 h30 r90
  text "GND" at 5023.29,2338.94 h30 r90
  text "PC13" at 3622,2313.95 h30 r90
  text "PC14" at 3727,2313.95 h30 r90
  text "PC15" at 3822,2313.95 h30 r90
Top Solder:
  region: 2677.9,2224.01 2427.9,1974.01 2058.9,1974.01 2058.9,2455.01 2150.9,2547.01 2354.9,2547.01 2545.9,2356.01
  region: 4976.99,2213.99 5226.99,1963.99 5595.99,1963.99 5595.99,2444.99 5503.99,2536.99 5299.99,2536.99 5108.99,2345.99
Bottom Solder:
  region: 2678.1,2224.09 2428.1,1974.09 2059.1,1974.09 2059.1,2455.09 2151.1,2547.09 2355.1,2547.09 2546.1,2356.09
  region: 4976.57,2213.2 5226.57,1963.19 5595.57,1963.19 5595.57,2444.2 5503.57,2536.2 5299.57,2536.2 5108.57,2345.2
Mechanical 1:
  lines w10: 2059,1975 2059,2456 2519,2916 2519,3752 2693,3926 3142,3926 4952,3926 5135,3743 5135,2905 5596,2444 5596,1964 5227,1964 4977,2214 2668,2214 2428,1974 2060,1974 2059,1975